# Altium PCB PCB.PcbDoc
Units mil, origin at the board's own origin, x right, y up, seen from the top; angles counter-clockwise.
Board outline 5295 x 4000 mil, 2 copper layers (Top Layer, Bottom Layer); 58 components, 69 nets, 264 pads, 11 vias.
Unrouted connection lines stored in the file: 6.
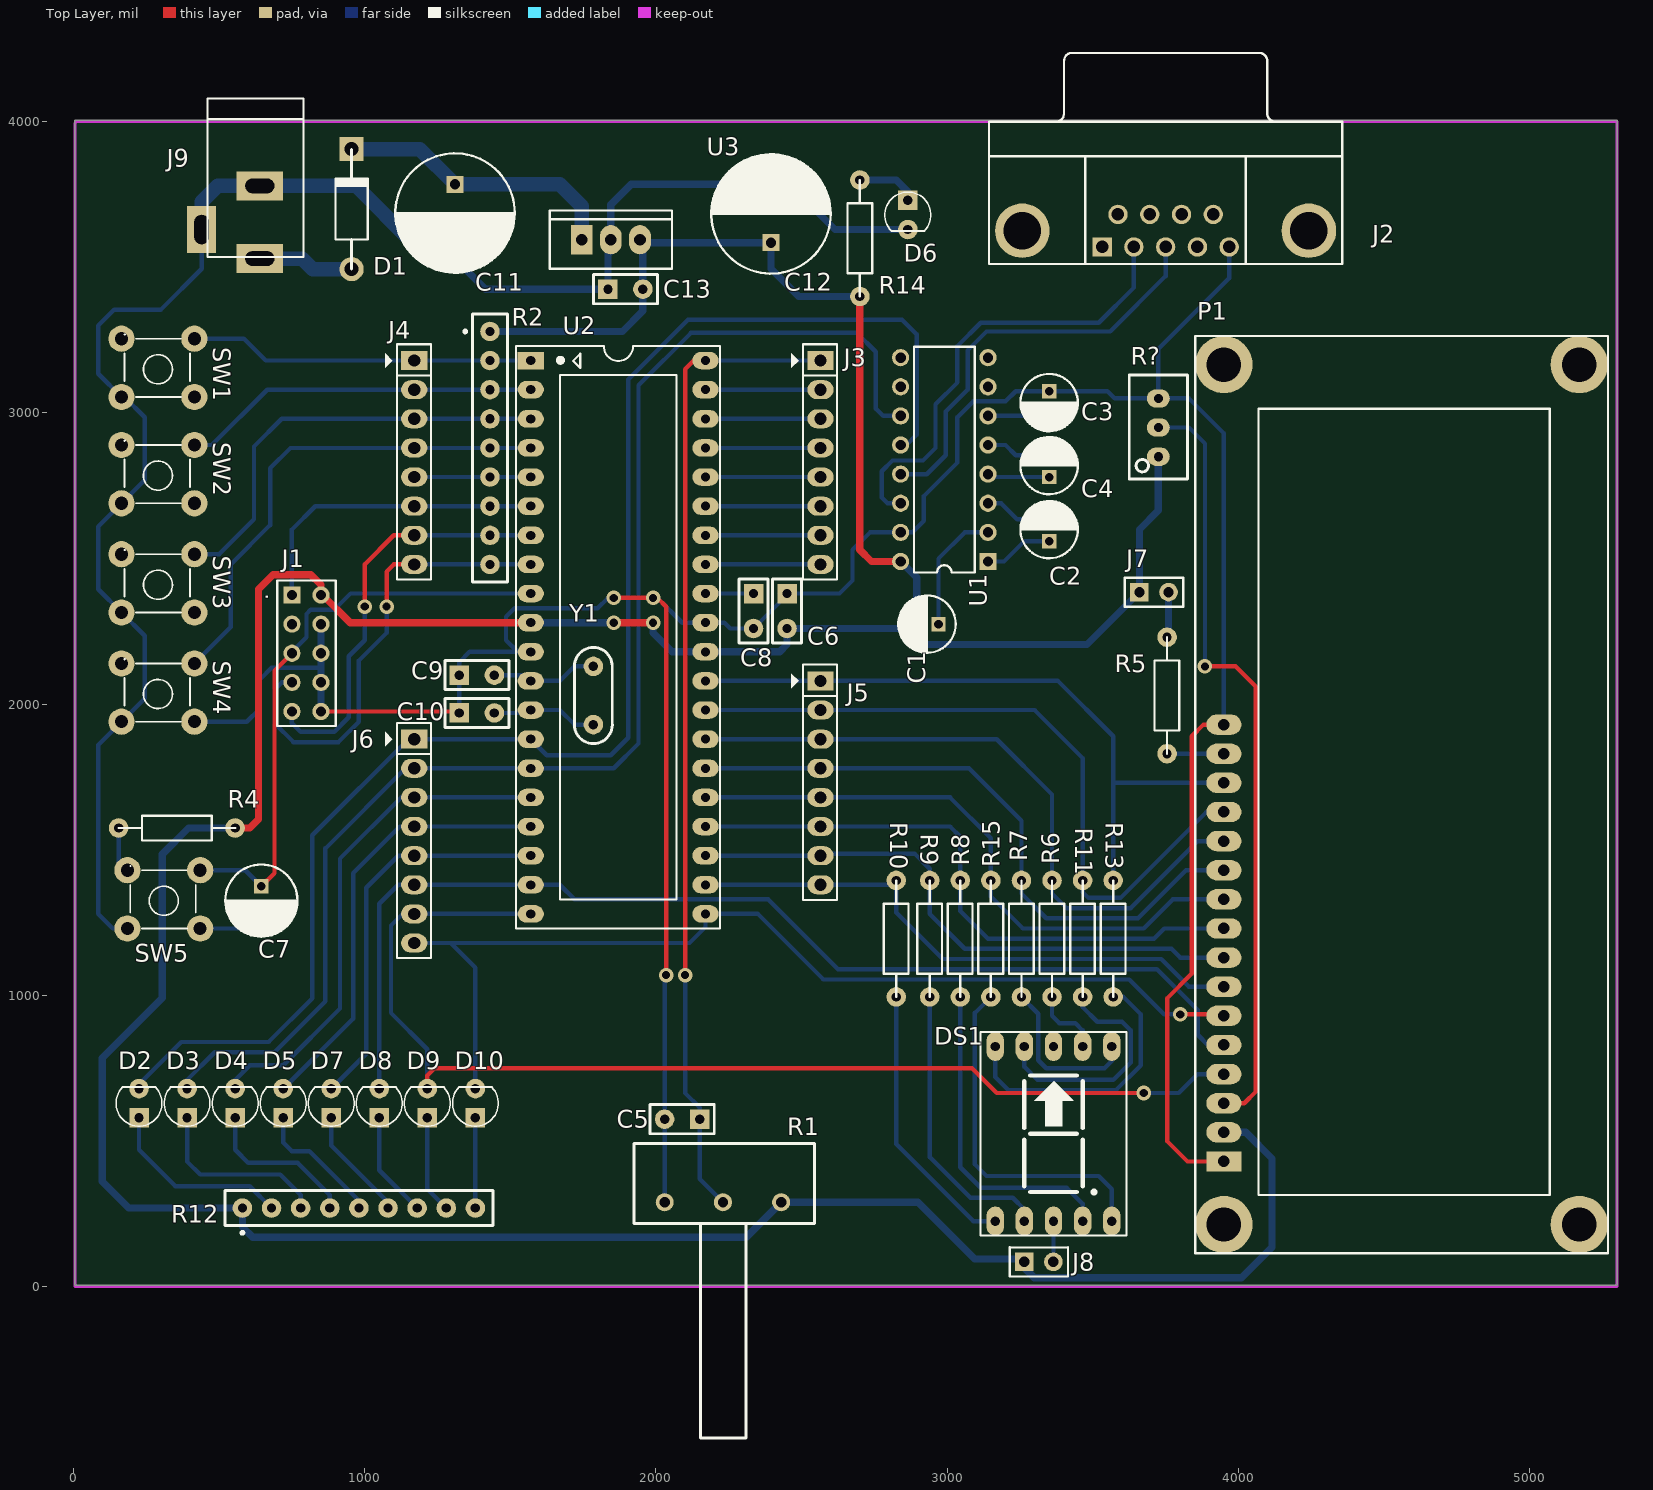
[diagram p0: Top Layer view]
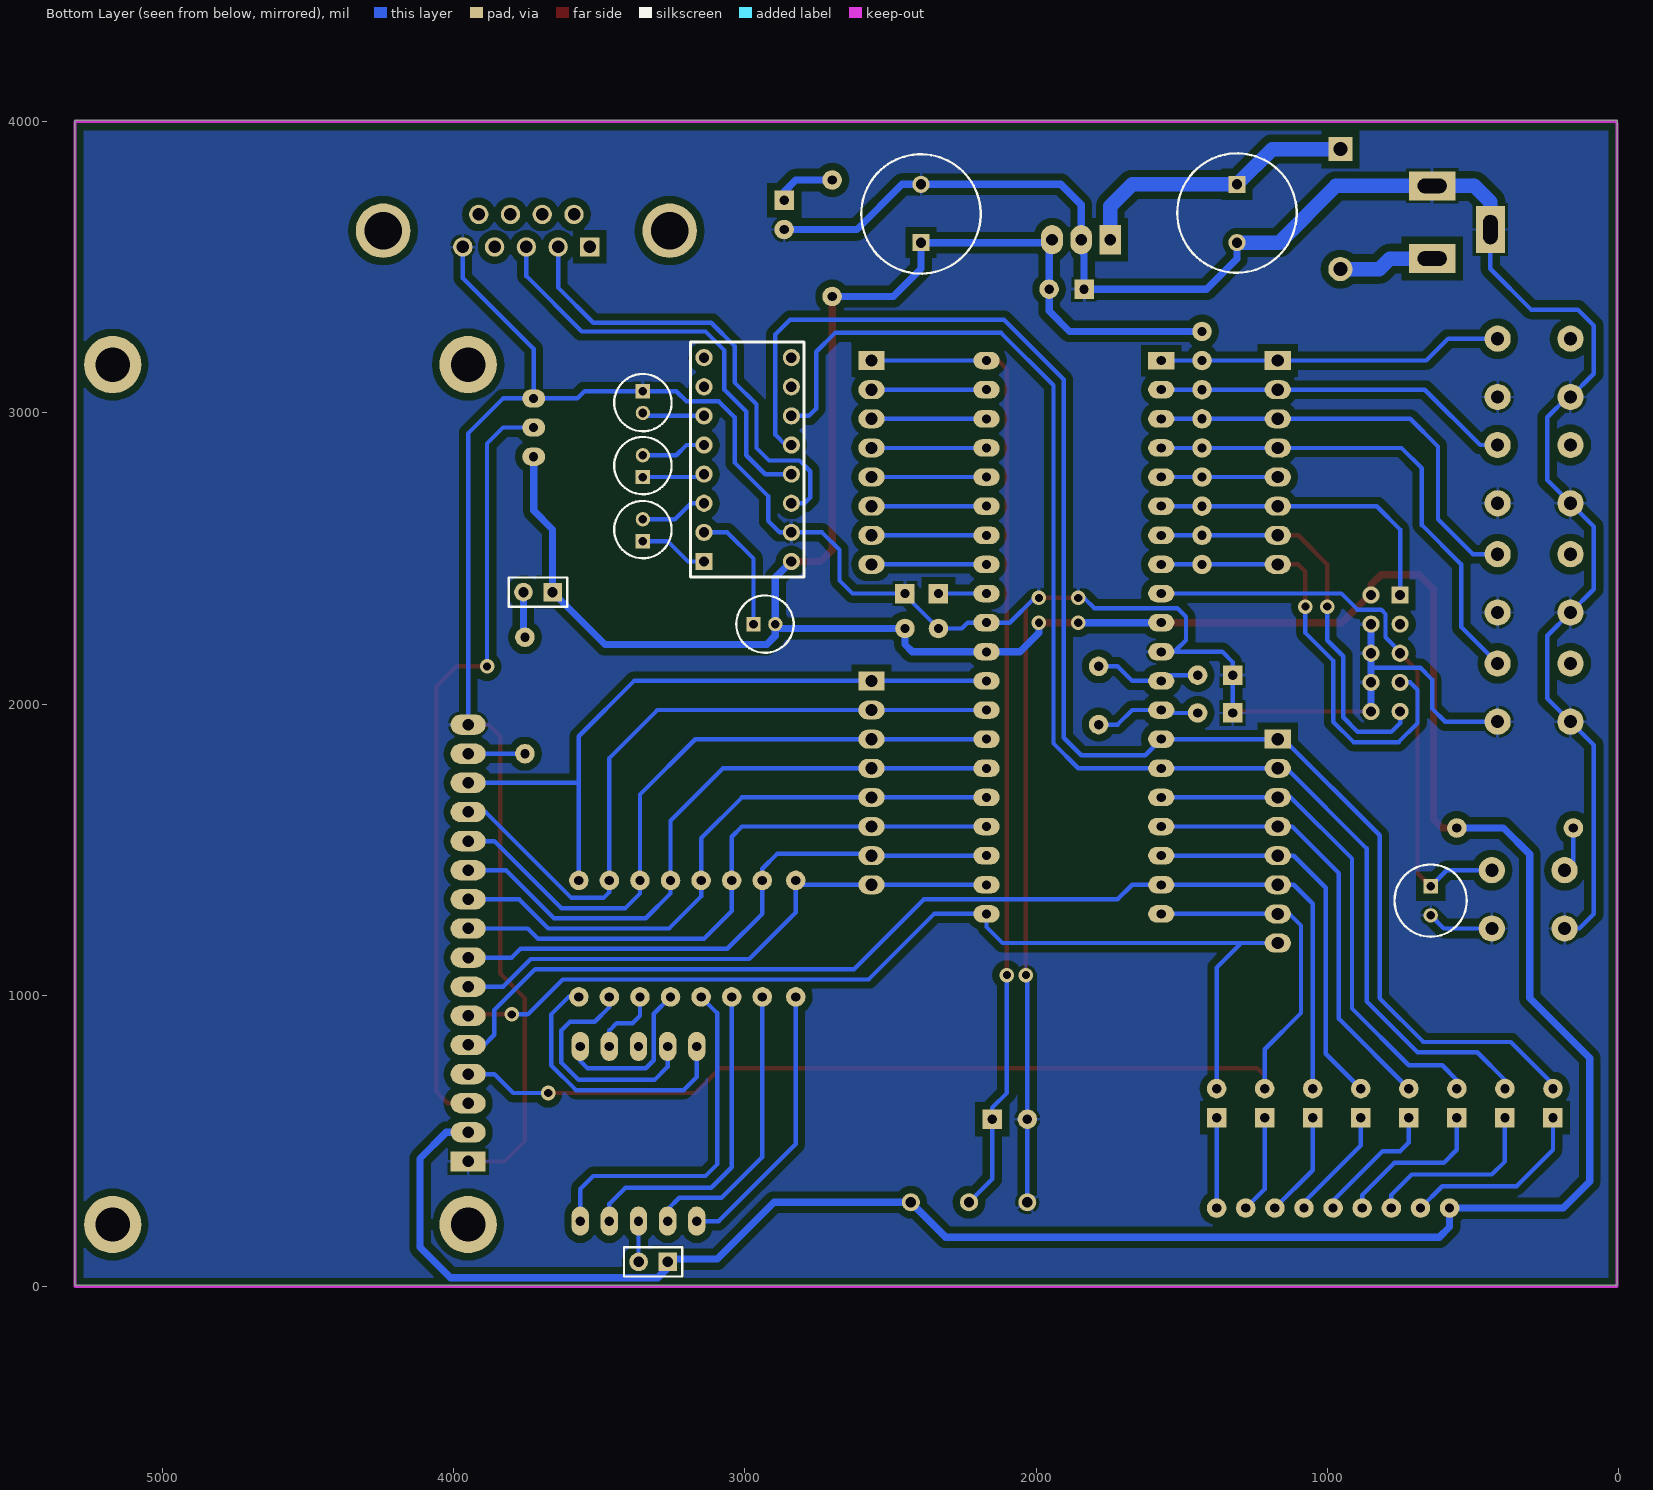
[diagram p1: Bottom Layer view, seen from below]
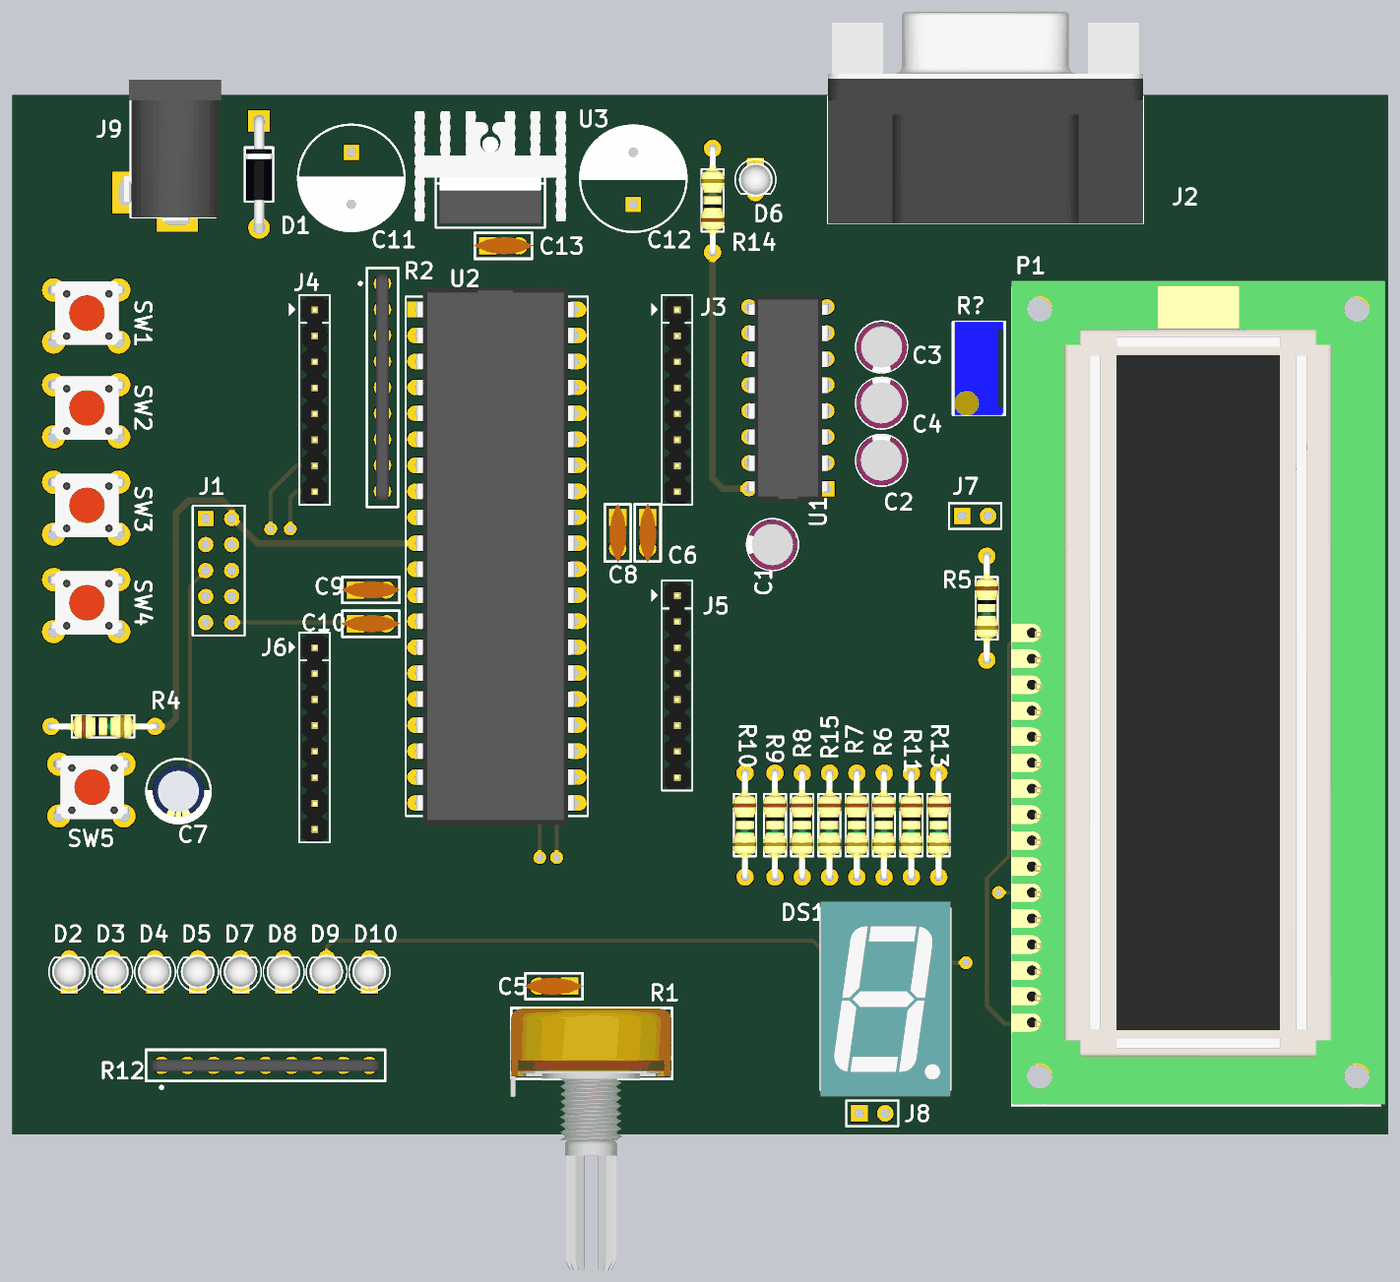
[diagram p2: 3D render of the assembled board from above, using the file's embedded part models]

## Layer stack, top to bottom
Top Solder: solder mask 0.4, Solder Resist, Dk 3.5
Top Layer: signal copper 1.4
Dielectric 1: dielectric 12.6, FR-4, Dk 4.8
Bottom Layer: signal copper 1.4
Bottom Solder: solder mask 0.4, Solder Resist, Dk 3.5

## Board outline
5,5 5300,5 5300,4005 5,4005

## Design rules (kind name [scope] priority, off if disabled: settings)
Clearance [All] p1: gap=10 ignorepadtopadclearanceinfootprint=FALSE
PolygonConnect [All] p1: connectstyle=Relief reliefconductorwidth=10 reliefentries=4 polygonreliefangle="90 Angle" airgapwidth=10
RoutingVias [All] p1: holewidth=28 width=50 viastyle="Through Hole" minholewidth=28 minwidth=50 maxholewidth=28 maxwidth=50
SolderMaskExpansion [All] p1: expansion=4
Width [All] p1: maxlimit=50 minlimit=15 preferedwidth=25
30 further rules are at their usual default settings.

## Components (designator, comment, footprint, x,y, rotation, side; value= is the part's Value field where it differs from the comment)
C1 "Cap Pol" "RADIAL B" 2970,2275 r180 top value=1uF
C2 "Cap Pol" "RADIAL B" 3350,2560 r90 top value=1uF
C3 "Cap Pol" "RADIAL B" 3350,3075 r270 top value=1uF
C4 "Cap Pol" "RADIAL B" 3350,2780 r90 top value=1uF
C5 "Cap Non-pol" "Cap Non-Pol 3mm" 2090,575 r180 top value=100nF
C6 "Cap Non-pol" "Cap Non-Pol 3mm" 2450,2320 r270 top value=100nF
C7 "Cap Pol" "RADIAL C" 645,1375 r270 top value=10uF
C8 "Cap Non-pol" "Cap Non-Pol 3mm" 2335,2320 r270 top value=100nF
C9 "Cap Non-pol" "Cap Non-Pol 3mm" 1385,2100 r0 top value=22pF
C10 "Cap Non-pol" "Cap Non-Pol 3mm" 1385,1970 r0 top value=22pF
C11 "Cap Pol" "RADIAL F" 1310,3785 r270 top value=1000uF
C12 "Cap Pol" "RADIAL F" 2395,3585 r90 top value=1000uF
C13 "Cap Non-pol" "Cap Non-Pol 3mm" 1895,3425 r0 top value=100nF
D1 "1N4007" DO-41 955,3700 r90 top
D2 "LED" "LED-0 3mm RED" 225,630 r180 top
D3 "LED" "LED-0 3mm RED" 390,630 r180 top
D4 "LED" "LED-0 3mm RED" 555,630 r180 top
D5 "LED" "LED-0 3mm RED" 720,630 r180 top
D6 "LED" "LED-0 3mm RED" 2865,3680 r0 top
D7 "LED" "LED-0 3mm RED" 885,630 r180 top
D8 "LED" "LED-0 3mm RED" 1050,630 r180 top
D9 "LED" "LED-0 3mm RED" 1215,630 r180 top
D10 "LED" "LED-0 3mm RED" 1380,630 r180 top
DS1 "7SEG-A" 7SEG_1LED 3165,225 r0 top
J1 "CON.HDR2x5" HDR2X5 750,2375 r270 top
J2 "DB-9 Connector" DB-9 3750,4000 r0 top
J3 "JP8 PIN" JP8 2565,3180 r270 top value=JP7
J4 "JP8 PIN" JP8 1170,3180 r270 top value=JP7
J5 "JP8 PIN" JP8 2565,2080 r270 top value=JP7
J6 "JP8 PIN" JP8 1170,1880 r270 top value=JP7
J7 "LCD jumper" CON.HDR1X2 3660.44,2384.72 r0 top value=J3
J8 "LED7 jumper" CON.HDR1X2 3265,85 r0 top value=J3
J9 "Jac DC" DC-IN 540,3655 r270 top
P1 "LCD16x2" LCD16x2 3954,429 r90 top
R1 "Trimmer" "POT - 24mm" 2230,290 r0 top value=10K
R2 "RES_PACK_8R" "Res Array" 1430,2480 r90 top
R4 "RESISTOR" "Res 10mm (1/2W)" 355,1575 r0 top value=10K
R5 "RESISTOR" "Res 10mm (1/2W)" 3755,2030 r270 top value=0R
R6 "RESISTOR" "Res 10mm (1/2W)" 3360,1195 r270 top value=1K
R7 "RESISTOR" "Res 10mm (1/2W)" 3255,1195 r270 top value=1K
R8 "RESISTOR" "Res 10mm (1/2W)" 3045,1195 r270 top value=1K
R9 "RESISTOR" "Res 10mm (1/2W)" 2940,1195 r270 top value=1K
R10 "RESISTOR" "Res 10mm (1/2W)" 2825,1195 r270 top value=1K
R11 "RESISTOR" "Res 10mm (1/2W)" 3465,1195 r270 top value=1K
R12 "RES_PACK_8R" "Res Array" 1380,270 r180 top
R13 "RESISTOR" "Res 10mm (1/2W)" 3570,1195 r270 top value=1K
R14 "RESISTOR" "Res 10mm (1/2W)" 2700,3600 r90 top value=1K
R15 "RESISTOR" "Res 10mm (1/2W)" 3150,1195 r270 top value=1K
R? "RV20K" RVAR10K 3725,2950 r90 top
SW1 "SW" SW4 415,3055 r180 top value="Button chip 4 pin"
SW2 "SW" SW4 415,2690 r180 top value="Button chip 4 pin"
SW3 "SW" SW4 415,2315 r180 top value="Button chip 4 pin"
SW4 "SW" SW4 415,1940 r180 top value="Button chip 4 pin"
SW5 "SW" SW4 435,1230 r180 top value="Button chip 4 pin"
U1 "MAX3232" DIP16 3140,2490 r90 top
U2 "ATMEL 16L" DIP40/W0.6 1570,3180 r270 top value="Atmega 16L"
U3 "LM78xx" TO-220-3-Heatsink 1745,3595 r0 top value=LM7805CT
Y1 "8MHz" XTAL 1785,2030 r180 top

## Footprints (in the part's own frame and the unit in brackets; to place one, negate y for a bottom-side part, rotate by r counter-clockwise, add the part's x,y. Pads: shape width x height; smd on the part's side, far side on the other; paste and mask are expansions set on the pad)
7SEG_1LED [mil] "DIP 10 Leads; Body 12 x 15 mm; Pitch 0.5 mm"
  oval 60x100 hole 32: 1(0,0) 2(100,0) 3(200,0) 4(300,0) 5(400,0) 6(400,600) 7(300,600) 8(200,600) 9(100,600) 10(0,600)
  silkscreen extent -50,-50 450,650, body extent -50,-75 450,675, height 316
"Cap Non-Pol 3mm" [mil] "Capacitor, Radial; Body 5.6 x 2.5 mm (L x W typ); Pin Spacing 3 mm (typ); Solder Pad 35mil"
  rect 67x67 hole 32: 1(-60,0)
  round 67 hole 32: 2(60,0)
  silkscreen extent -110,-50 110,50, body extent -115,-33 115,34, height 245
CON.HDR1X2 [mil]
  rect 64x64 hole 35.43: 1(-0.44,0.28)
  round 64 hole 35.43: 2(99.56,0.28)
  silkscreen extent -51,-50 150,50, body extent -51,-50 149,50, height 350
DB-9 [mm] "Connector; D Subminiature; 9 Position; Right Angle; Pitch 1.385 mm"
  rect 1.69x1.69 hole 1.09: 1(-5.54,-10.92)
  round 1.69 hole 1.09: 2(-2.77,-10.92) 3(0,-10.92) 4(2.77,-10.92) 5(5.54,-10.92) 6(-4.155,-8.08) 7(-1.385,-8.08) 8(1.385,-8.08) 9(4.155,-8.08)
  round 4.76 hole 3.26: 10(-12.495,-9.5) 11(12.495,-9.5)
  silkscreen extent -15.4,-12.4 15.4,6, body extent -15.4,-12.47 15.4,8.23, height 3.34
DC-IN [mil] "Jac DC input"
  rect 100x160 hole 50 slot 100 at 90 deg: 1(125,100) 2(-125,100)
  rect 160x100 hole 50 slot 100 at 0 deg: 3(25,-100)
  silkscreen extent -425,-80 120,250, body extent -410,-105 134,269, height 434
DIP16 [mm] "DIP; 16 Leads; Row Spacing 7.62 mm; Pitch 2.54 mm"
  rect 1.5x1.5 hole 0.9: 1(0,0)
  round 1.5 hole 0.9: 2(2.54,0) 3(5.08,0) 4(7.62,0) 5(10.16,0) 6(12.7,0) 7(15.24,0) 8(17.78,0) 9(17.78,7.62) 10(15.24,7.62) 11(12.7,7.62) 12(10.16,7.62) 13(7.62,7.62) 14(5.08,7.62) 15(2.54,7.62) 16(0,7.62)
  silkscreen extent -0.96,1.16 18.74,6.46, body extent -1.15,-0.15 18.85,7.73, height 5.08
DIP40/W0.6 [mil] "40 PIN, W 600mil, Pin to pin 100mil"
  rect 60x90 hole 31: 1(0,0)
  oval 60x90 hole 31: 2(100,0) 3(200,0) 4(300,0) 5(400,0) 6(500,0) 7(600,0) 8(700,0) 9(800,0) 10(900,0) 11(1000,0) 12(1100,0) 13(1200,0) 14(1300,0) 15(1400,0) 16(1500,0) 17(1600,0) 18(1700,0) 19(1800,0) 20(1900,0) 21(1900,600) 22(1800,600) 23(1700,600) 24(1600,600) 25(1500,600) 26(1400,600) 27(1300,600) 28(1200,600) 29(1100,600) 30(1000,600) 31(900,600) 32(800,600) 33(700,600) 34(600,600) 35(500,600) 36(400,600) 37(300,600) 38(200,600) 39(100,600) 40(0,600)
  silkscreen extent -50,-50 1950,650, body extent -82,-10 1982,600, height 224
DO-41 [mil] "Diode, Axial; Body 5.2 x 2.7 mm (LxDia. max), Lead Dia. 0.86 mm (max); Solder Pad 35mil"
  round 83 hole 48: 1(-205.91,0)
  rect 83x83 hole 48: 2(205.91,0)
  silkscreen extent -205,-55 205,55, body extent -228,-49 228,49, height 104
HDR2X5 [mm] "Connector; Header; 5x2 Position"
  rect 1.5x1.5 hole 0.9: 1(0,0)
  round 1.5 hole 0.9: 2(0,2.54) 3(2.54,0) 4(2.54,2.54) 5(5.08,0) 6(5.08,2.54) 7(7.62,0) 8(7.62,2.54) 9(10.16,0) 10(10.16,2.54)
  silkscreen extent -1.27,-1.27 11.43,3.81
JP8 [mil] "JP8"
  rect 65x90 hole 42: 1(0,0)
  oval 65x90 hole 42: 2(100,0) 3(200,0) 4(300,0) 5(400,0) 6(500,0) 7(600,0) 8(700,0)
  silkscreen extent -56,-100 752,57, body extent -48,-50 748,48, height 323
LCD16x2 [mil] "Character LCD 16x2"
  round 196.85 hole 118.11: 0(-215.54,4) 0(-215.54,-1216.47) 0(2737.22,-1216.47) 0(2737.22,4)
  rect 70x120 hole 39.37: 1(1,4)
  oval 70x120 hole 39.37: 2(101,4.02) 3(201,4) 4(301,4) 5(401,4) 6(501,4) 7(601,4) 8(701,4) 9(801,4) 10(901,4) 11(1001,4) 12(1101,4) 13(1201,4) 14(1301,4) 15(1401,4) 16(1501,4)
  round 0 all layers, no hole: ""(-215.54,4)
  silkscreen extent -314,-1315 2836,102, body extent -309,-1333 2861,104, height 788
"LED-0 3mm RED" [mil] "Typical LED; RED; 2 Leads; Solder Pad 35mil"
  rect 67x67 hole 32: 1(0,50)
  round 67 hole 32: 2(0,-50)
  silkscreen extent -79,-56 79,79, body extent -64,-66 66,64, height 207
"POT - 24mm" [mil]
  round 62 hole 35: 1(-200,0) 2(0,0) 3(200,0)
  silkscreen extent -305,-810 314,201, body extent -308,-808 312,198, height 812
"RADIAL B" [mm] "Capacitor, Electrolytic, Radial; Body 5 x 6.8 mm (Dia.xH typ); Pin Spacing 2 mm (typ)"
  rect 1.25x1.25 hole 0.75: 1(0,0)
  round 1.25 hole 0.75: 2(1.905,0)
  silkscreen extent -1.5,-2.5 3.5,2.51, body extent -1.48,-2.49 3.52,2.51, height 11
"RADIAL C" [mm] "Capacitor, Electrolytic, Radial; Body 6.3 x 6.8 mm (Dia.xH typ); Pin Spacing 2.5 mm (typ)"
  rect 1.25x1.25 hole 0.75: 1(0,0)
  round 1.25 hole 0.75: 2(2.54,0)
  silkscreen extent -1.9,-3.15 4.4,3.15, body extent -1.27,-2.54 3.81,2.54, height 13.7
"RADIAL F" [mm] "Capacitor, Electrolytic, Radial; Body 10 x 10.5 mm (Dia.xH typ); Pin Spacing 5 mm (typ)"
  rect 1.5x1.5 hole 0.9: 1(0,0)
  round 1.5 hole 0.9: 2(5.08,0)
  silkscreen extent -2.71,-5.21 7.75,5.21, body extent -2.54,-5.08 7.54,5.08, height 11.51
"Res 10mm (1/2W)" [mil] "Resistor; 2 Leads; 1/2W; Solder Pad 35mil"
  round 67 hole 32: 1(-200,0) 2(200,0)
  silkscreen extent -200,-43 200,42, body extent -212,-46 212,45, height 96
"Res Array" [mil] "Resistor Array; 9 Leads; Solder Pad 35mil"
  round 67 hole 32: 1(0,0) 2(100,0) 3(200,0) 4(300,0) 5(400,0) 6(500,0) 7(600,0) 8(700,0) 9(800,0)
  silkscreen extent -60,-60 860,90, body extent -42,-24 843,25, height 199
RVAR10K [mm] "Bien tro vi chinh"
  oval 1.6x2 hole 0.8: 1(-2.54,0) 2(0,0) 3(2.54,0)
  silkscreen extent -4.47,-2.54 4.6,2.54, body extent -4.54,-2.4 4.66,2.4, height 12.02
SW4 [mil] "SW button 4pin, 250 x250 mil"
  round 90 hole 45: 1(0,0) 2(250,-200) 3(250,0) 4(0,-200)
  silkscreen extent 15,-215 240,0, body extent -34,-233 278,11, height 276
TO-220-3-Heatsink [mil] "TO-220; Heatsink; 3 Leads; Solder Pad 35mil"
  rect 75x100 hole 40: 1(0,0)
  oval 75x100 hole 40: 2(100,0) 3(200,0)
  silkscreen extent -110,-100 310,100, body extent -191,-83 391,349, height 985
XTAL [mil] "Crystal, Thru-Hole; 2 Leads; Body 3.1 x 8.2 mm (Dia.xH); Solder pad 35mil"
  round 67 hole 32: 1(0,100) 2(0,-100)
  silkscreen extent -65,-165 65,165, body extent -92,-223 92,223, height 139

## Part data
C1 C2 C3 C4 C7 C11 C12: "Polarized Capacitor", LatestRevisionNote="Re-released for DXP Platform.", PackageReference=POLAR0.8, Publisher="Altium Limited"
C5 C6 C8 C9 C10 C13: "Non-polarized Capacitor", LatestRevisionNote="Re-released for DXP Platform.", PackageReference=RAD-0.3, Publisher="Altium Limited"
D1: library part "Diode 1N4007", "1 Amp General Purpose Rectifier", Code_JEDEC=DO-204-AL, ComponentLink1Description="Manufacturer Link", ComponentLink1URL=http://www.fairchildsemi.com/, ComponentLink2Description=Datasheet, ComponentLink2URL=http://www.fairchildsemi.com/ds/1N%2F1N4001.pdf, DatasheetVersion=1998, LatestRevisionDate=17-Jul-2002, LatestRevisionNote="Re-released for DXP Platform.", PackageDescription="Diode, Axial; Body 5.2 x 2.7 mm (LxDia. max), Lead Dia. 0.86 mm (max)", PackageReference=DO-41, PackageVersion=Aug-1999, Published=8-Jun-2000, Publisher="Altium Limited"
D2 D3 D4 D5 D6 D7 D8 D9 D10: "Typical LED", LatestRevisionDate=08-Jul-2005, LatestRevisionNote="Mech Layer 1 removed.", PackageReference=LED-1, Published=8-Jun-2000, Publisher="Altium Limited"
DS1: library part LED7SEG-A, "14.2 mm General Purpose Blue 7-Segment Display: CA, RH DP, Gray Surface", Colour=Blue, PackageDocument=24-Sep-2002, ComponentLink1Description="Manufacturer Link", ComponentLink1URL=http://www.agilent.com/, DatasheetDocument=24-Sep-2002, LatestRevisionDate=17-Dec-2003, LatestRevisionNote="Schematic revised, PCB Footprint replaced.", MinimumIntensity="2020 ucd", Note="IF = 10 mA", PackageReference=H, Published=8-Jun-2000, Publisher="Altium Limited"
J1: "Header 2x5", ComponentLink1Description="Digikey Part link", ComponentLink2Description="Open DataSheet", ComponentLink2URL=H:\LIBRARY\LIBRARY.Datasheet\, Publisher="Hoang Nguyen"
J2: "9-pin, D-Subminiature Connector", PackageDocument=O, DatasheetDocument=1-Sep-1999, Gender=Receptacle, LatestRevisionDate=17-Jul-2002, LatestRevisionNote="Re-released for DXP Platform.", Orientation="Right Angle", PackageReference=788750, Positions=9, Published=15-Jun-2001, Publisher="Altium Limited"
J3 J4 J5 J6: library part JP8
J7 J8: library part JP2, "Jumper 3"
J9: library part DCIN, "Jac DC input"
P1: library part "LCD Text"
R1: library part "Variable Resistor", ComponentLink1Description="Digikey Part Link", ComponentLink2Description="Open Datasheet", ComponentLink2URL=H:\LIBRARY\LIBRARY.Datasheet\, LatestRevisionDate=04-Mar-2005, LatestRevisionNote="PCB Footprint replaced.", PackageReference=J1-0603, Published=8-Jun-2000, Publisher="Altium Limited", Vendor=Digikey
R2 R12: "Isolated Resistor Network", Code_JEDEC=MO-150-AC, LatestRevisionDate=17-Jul-2002, LatestRevisionNote="Re-released for DXP Platform.", PackageReference=SSOP16, Published=24-Mar-1999, Publisher="Altium Limited"
R4 R5 R6 R7 R8 R9 R10 R11 R13 R14 R15: "Resistor", LatestRevisionDate=17-Jul-2002, LatestRevisionNote="Re-released for DXP Platform.", PackageReference=AXIAL-0.3, Published=8-Jun-2000, Publisher="Altium Limited"
R?: library part "Variable Resistor_1", "Variable Resistor", LatestRevisionDate=17-Jul-2002, LatestRevisionNote="Re-released for DXP Platform.", PackageReference=VR5, Published=8-Jun-2000, Publisher="Altium Limited", Set Position=0.5, Sim Note="Enter the Resistance value and the set point into parameter fields."
SW1 SW2 SW3 SW4 SW5: library part SW4, "Switch button 4 pin"
U1: library part MAX232, "3.0V TO 5.5V, Low-Power, up to 1Mbps, True RS-232 Transceiver Using Four 0.1µF External Capacitor", Manufacturer="Maxim Integrated Products", Manufacturer P/N=MAX3232CSE+, ComponentLink1Description="Digikey Part Link", ComponentLink2Description="Open Datasheet", ComponentLink2URL=H:\LIBRARY\LIBRARY.Datasheet\, Price="10000 VND", Published=13-April-2009, Publisher="Hoang Nguyen", Vendor=Digikey, Vendor P/N=MAX3232CSE+-ND
U2: library part Atmega16L, "8-Bit AVR Microcontroller with 16K Bytes of In-System Programmable Flash Memory", Designed By="John MacTavish"
U3: "Regulator", Manufacturer="Fairchild Semiconductor Corporation", Output Current="Up to 1A", PSpiceTemplate="X^@REFDES %IN %OUT %GND @MODEL", Tolerance="4 %", ComponentLink1Description="Digikey Part Link", ComponentLink2Description="Open Datasheet", ComponentLink2URL=H:\LIBRARY\LIBRARY.Datasheet\LM7805.pdf, Price="2500 VND", Published=13-April-2009, Publisher="Hoang Nguyen", Vendor=Digikey, V out=5V
Y1: library part XTAL, "Crystal Oscillator", LatestRevisionDate=17-Jul-2002, LatestRevisionNote="Re-released for DXP Platform.", PackageReference=R38, Published=8-Jun-2000, Publisher="Altium Limited"

## Via types
v1: diameter 50, hole 28, Top Layer to Bottom Layer, 11 vias

## Nets (pads, with @x,y where several pads share a name; then routed paths per layer and width w, separated by ;. In a path a pad name is that pad's centre, name@x,y a point inside that pad or via, vN(x,y) a via of type N, cw(c..) or ccw(c..) an arc to the next point about the centre after c; other vN are vias at no path point)
GND: C3.1 C5.2 C6.1 C7.2 C8.2 C9.1 C10.1 C11.2 C12.2 C13.1 D6.2 J1.4 J1.6 J1.8 J1.10 J2.5 J9.2 J9.3 P1.1 P1.16 R1.1 R?.3 SW1.1 SW1.3 SW2.1 SW2.3 SW3.1 SW3.3 SW4.1 SW4.3 SW5.1 SW5.3 U1.15 U2.11 U2.31 U3.2 | length 16895
  Top Layer w15: J1.10 1320,1975 C10.1 ; v1(1855,2365) v1(1990,2365) 2005,2365 2035,2335 v1(2035,1070) ; P1.1 3825,430 3755,500 3755,990 3840,1075 3840,1890 3880,1930 P1.16
  Bottom Layer w15: SW5.3 135,1230 85,1280 85,1860 SW4.3 245,2020 245,2235 SW3.3 85,2395 85,2610 SW2.3 245,2770 245,2985 175,3055 SW1.3 85,3135 85,3300 140,3355 300,3355 440,3495 J9.3 ; SW4.1 595,1940 640,1985 640,2085 680,2125 850,2125 ; SW5.1 600,1230 C7.2 ; C10.1 C9.1 1325,2145 1360,2180 U2.11@1525,2180 ; U2.11 U2.11@1525,2180 ; v1(1855,2365) 1835,2365 1800,2330 1515,2330 1485,2300 1485,2220 U2.11@1525,2180 ; v1(1990,2365) 2005,2365 2090,2280 U2.31 2235,2280 2255,2260 C8.2 2440,2365 2425,2380 C6.1 2630,2380 2675,2425 2675,2530 2735,2590 U1.15 2880,2590 2920,2630 2920,2715 3035,2830 3035,2985 3090,3040 3200,3040 3235,3075 C3.1 3550,3075 3575,3050 R?.3 ; R1.1 C5.2 2030,1065 v1(2035,1070) ; P1.16 3950,2930 3830,3050 R?.3 ; J2.5 3968.11,3463.11 3725,3220 R?.3
  Bottom Layer w25: J1.10 J1.8 850,2125 J1.6 J1.4 ; C11.2 1310,3530 1415,3425 C13.1 1835,3545 1845,3555 U3.2 1845,3715 1915,3785 C12.2 2460,3785 2615,3630 D6.2
  Bottom Layer w50: J9.3 440,3725 495,3780 J9.2 970,3780 1165,3585 C11.2
MISO: J1.9 J4.7 R2.2 U2.7 | length 1427.3
  Top Layer w15: v1(1000,2335) 1000,2480 1100,2580 J4.7
  Bottom Layer w15: J1.9 750,1935 780,1905 895,1905 945,1955 945,2165 1000,2220 v1(1000,2335) ; J4.7 R2.2 U2.7
MOSI: J1.1 J4.6 R2.3 U2.6 | length 1078.1
  Bottom Layer w15: J1.1 750,2600 830,2680 J4.6 R2.3 U2.6
NetC1_1: C1.1 U1.2 | length 432.3
  Bottom Layer w15: C1.1 2970,2500 3060,2590 U1.2
NetC2_1: C2.1 U1.1 | length 239
  Bottom Layer w15: U1.1 3195,2490 3265,2560 C2.1
NetC2_2: C2.2 U1.3 | length 232.8
  Bottom Layer w15: U1.3 3185,2690 3240,2635 C2.2
NetC3_2: C3.2 U1.6 | length 214.1
  Bottom Layer w15: U1.6 3340,2990 C3.2
NetC4_1: C4.1 U1.4 | length 214.1
  Bottom Layer w15: U1.4 3150,2790 3160,2780 C4.1
NetC4_2: C4.2 U1.5 | length 224.5
  Bottom Layer w15: U1.5 3200,2890 3235,2855 C4.2
NetC5_1: C5.1 J3.1 R1.2 U2.40 | length 3391.3
  Top Layer w15: v1(2100,1070) 2100,3150 2130,3180 U2.40
  Bottom Layer w15: v1(2100,1070) 2100,665 2150,615 C5.1 2150,370 R1.2 ; U2.40 J3.1
NetC8_1: C8.1 U2.32 | length 165
  Bottom Layer w15: U2.32 C8.1
NetC9_2: C9.2 U2.12 Y1.2 | length 369
  Bottom Layer w15: C9.2 1550,2100 U2.12 1670,2080 1720,2130 Y1.2
NetC10_2: C10.2 U2.13 Y1.1 | length 364.9
  Bottom Layer w15: C10.2 1560,1970 U2.13 1670,1980 1720,1930 Y1.1
NetC11_1: C11.1 D1.2 U3.1 | length 986.1
  Bottom Layer w50: D1.2 1189.09,3905.91 C11.1 1670,3785 1745,3710 U3.1
NetD1_1: D1.1 J9.1 | length 329.9
  Bottom Layer w50: J9.1 785,3530 820.91,3494.09 D1.1
NetD2_1: D2.1 R12.8 | length 647.8
  Bottom Layer w15: D2.1 225,470 350,345 605,345 R12.8
NetD3_1: D3.1 R12.7 | length 632.6
  Bottom Layer w15: D3.1 390,430 435,385 710,385 780,315 R12.7
NetD4_1: D4.1 R12.6 | length 544.2
  Bottom Layer w15: D4.1 555,470 600,425 770,425 880,315 R12.6
NetD5_1: D5.1 R12.5 | length 452.8
  Bottom Layer w15: D5.1 720,495 750,465 810,465 980,295 R12.5
NetD6_1: D6.1 R14.2 | length 211.6
  Bottom Layer w25: R14.2 2825,3800 2865,3760 D6.1
NetD7_1: D7.1 R12.4 | length 390.8
  Bottom Layer w15: D7.1 885,485 1080,290 R12.4
NetD8_1: D8.1 R12.3 | length 363.8
  Bottom Layer w15: D8.1 1050,400 R12.3
NetD9_1: D9.1 R12.2 | length 336.9
  Bottom Layer w15: D9.1 1215,335 R12.2
NetD10_1: D10.1 R12.1 | length 310
  Bottom Layer w15: R12.1 D10.1
NetDS1_1: DS1.1 R10.2 | length 954.8
  Bottom Layer w15: R10.2 2825,490 3090,225 DS1.1
NetDS1_2: DS1.2 R9.2 | length 989.6
  Bottom Layer w15: R9.2 2940,445 3080,305 3225,305 3265,265 DS1.2
NetDS1_3: DS1.3 DS1.8 J8.2 | length 139.9
  Bottom Layer w15: J8.2 3365,85.72 DS1.3
NetDS1_4: DS1.4 R8.2 | length 1116.8
  Bottom Layer w15: R8.2 3045,410 3115,340 3410,340 3465,285 DS1.4
NetDS1_5: DS1.5 R15.2 | length 1213
  Bottom Layer w15: R15.2 3095,940 3095,420 3135,380 3520,380 3565,335 DS1.5
NetDS1_6: DS1.6 R7.2 | length 565.6
  Bottom Layer w15: R7.2 3312.5,937.5 3312.5,777.5 3340,750 3540,750 3565,775 DS1.6
NetDS1_7: DS1.7 R6.2 | length 245.7
  Bottom Layer w15: R6.2 3360,930 3385,905 3440,905 3465,880 DS1.7
NetDS1_9: DS1.9 R11.2 | length 821.6
  Bottom Layer w15: DS1.9 3265,755 3310,710 3570,710 3630,770 3630,880 3600,910 3515,910 3465,960 R11.2
NetDS1_10: DS1.10 R13.2 | length 953.7
  Bottom Layer w15: DS1.10 3165,720 3210,675 3580,675 3665,760 3665,935 3605,995 R13.2
NetJ3_2: J3.2 U2.39 | length 395
  Bottom Layer w15: U2.39 J3.2
NetJ3_3: J3.3 U2.38 | length 395
  Bottom Layer w15: U2.38 J3.3
NetJ3_4: J3.4 U2.37 | length 395
  Bottom Layer w15: U2.37 J3.4
NetJ3_5: J3.5 U2.36 | length 395
  Bottom Layer w15: U2.36 J3.5
NetJ3_6: J3.6 U2.35 | length 395
  Bottom Layer w15: U2.35 J3.6
NetJ3_7: J3.7 U2.34 | length 395
  Bottom Layer w15: U2.34 J3.7
NetJ3_8: J3.8 U2.33 | length 395
  Bottom Layer w15: U2.33 J3.8
NetJ7_2: J7.2 R5.1 | length 157.1
  Bottom Layer w25: R5.1 3760,2235 J7.2
NetP1_3: P1.3 R?.2 | length 2668.3
  Top Layer w15: v1(3885,2130) 3990,2130 4060,2060 4060,670 4020,630 P1.3
  Bottom Layer w15: R?.2 3830,2950 3885,2895 v1(3885,2130)
NetP1_15: P1.15 R5.2 | length 195
  Bottom Layer w15: R5.2 P1.15
PB0: J4.1 R2.8 SW1.2 SW1.4 U2.1 | length 1186.1
  Bottom Layer w15: SW1.4 585,3255 660,3180 J4.1 R2.8 U2.1
PB1: J4.2 R2.7 SW2.2 SW2.4 U2.2 | length 1233.7
  Bottom Layer w15: SW2.4 475,2890 665,3080 J4.2 R2.7 U2.2
PB2: J4.3 R2.6 SW3.2 SW3.4 U2.3 | length 1494.1
  Bottom Layer w15: SW3.4 500,2515 620,2635 620,2885 715,2980 J4.3 R2.6 U2.3
PB3: J4.4 R2.5 SW4.2 SW4.4 U2.4 | length 1701.7
  Bottom Layer w15: SW4.4 540,2265 540,2480 675,2615 675,2810 745,2880 J4.4 R2.5 U2.4
PB4: J4.5 R2.4 U2.5 | length 400
  Bottom Layer w15: J4.5 R2.4 U2.5
PC0: J5.8 P1.7 R10.1 U2.22 | length 2001.8
  Bottom Layer w15: U2.22 J5.8 2810,1380 R10.1 2825,1285 2985,1125 3735,1125 3830,1030 P1.7
PC1: J5.7 P1.8 R9.1 U2.23 | length 2024.3
  Bottom Layer w15: U2.23 J5.7 2565,1486 2889,1486 2940,1435 R9.1 2940,1280 3060,1160 3770,1160 3800,1130 P1.8
PC2: J5.6 P1.9 R8.1 U2.24 | length 2103.3
  Bottom Layer w15: U2.24 J5.6 3010,1580 3045,1545 R8.1 3045,1290 3140,1195 3710,1195 3745,1230 P1.9
PC3: J5.5 P1.10 R15.1 U2.25 | length 2125
  Bottom Layer w15: U2.25 J5.5 3010,1680 3150,1540 R15.1 3150,1340 3260,1230 3675,1230 3775,1330 P1.10
PC4: J5.4 P1.11 R7.1 U2.26 | length 2208.1
  Bottom Layer w15: U2.26 J5.4 3075,1780 3255,1600 R7.1 3255,1350 3340,1265 3655,1265 3820,1430 P1.11
PC5: J5.3 P1.12 R6.1 U2.27 | length 2314.7
  Bottom Layer w15: U2.27 J5.3 3170,1880 3360,1690 R6.1 3360,1350 3410,1300 3630,1300 3860,1530 P1.12
PC6: J5.2 P1.13 R11.1 U2.28 | length 2438.8
  Bottom Layer w15: U2.28 J5.2 3300,1980 3465,1815 R11.1 3465,1355 3485,1335 3595,1335 3890,1630 P1.13
PC7: J5.1 P1.14 R13.1 U2.29 | length 2355.8
  Bottom Layer w15: U2.29 J5.1 3380,2080 3570,1890 3570,1735 ; R13.1 3570,1735 ; P1.14 3575,1730 3570,1735
PD2: D4.2 J6.3 U2.16 | length 1748.5
  Bottom Layer w15: D4.2 555,710 605,760 720,760 915,955 915,1470 1125,1680 J6.3 U2.16
PD3: D5.2 J6.4 U2.17 | length 1515.7
  Bottom Layer w15: D5.2 960,920 960,1420 1120,1580 J6.4 U2.17
PD4: D7.2 J6.5 U2.18 | length 1350.3
  Bottom Layer w15: D7.2 1005,800 1005,1370 1115,1480 J6.5 U2.18
PD5: D8.2 J6.6 P1.5 U2.19 | length 3839.5
  Bottom Layer w15: D8.2 1050,1315 1115,1380 J6.6 U2.19 1670,1380 1720,1330 2385,1330 2625,1090 3720,1090 3860,950 3860,865 3895,830 P1.5
PD6: D9.2 J6.7 P1.4 U2.20 | length 3960.8
  Top Layer w15: D9.2 1215,725 1240,750 3085,750 3170,665 v1(3675,665)
  Bottom Layer w15: D9.2 1215,815 1090,940 1090,1240 1130,1280 J6.7 U2.20 ; v1(3675,665) 3795,665 3860,730 P1.4
PD7: D10.2 J6.8 P1.6 U2.21 | length 3528
  Top Layer w15: v1(3800,935) 3945,935 P1.6
  Bottom Layer w15: J6.8 1295,1180 ; D10.2 1380,1095 1295,1180 ; v1(3800,935) 3745,935 3625,1055 2575,1055 2350,1280 U2.21 2170,1235 2115,1180 1295,1180
RESET: C7.1 J1.5 R4.1 SW5.2 SW5.4 U2.9 | length 2188.4
  Top Layer w15: C7.1 690,1420 690,2115 J1.5
  Bottom Layer w15: R4.1 155,1460 SW5.2 ; SW5.4 590,1430 C7.1 ; J1.5 750,2180 800,2230 800,2310 815,2325 896.51,2325 951.51,2380 U2.9
RX_RS: J2.3 U1.13 | length 1458.7
  Bottom Layer w15: U1.13 2930,2790 2995,2855 2995,3005 3070,3080 3070,3215 3135,3280 3560,3280 3750,3470 J2.3
RXD: D2.2 J6.1 U1.12 U2.14 | length 5301.6
  Bottom Layer w15: D2.2 225,695 370,840 670,840 820,990 820,1550 1150,1880 J6.1 U2.14 1625,1825 1845,1825 1905,1885 1905,3115 2110,3320 2845,3320 2895,3270 2895,2925 2860,2890 U1.12
SCK: J1.7 J4.8 R2.1 U2.8 | length 1598.1
  Top Layer w15: v1(1075,2335) 1075,2455 1100,2480 J4.8
  Bottom Layer w15: J1.7 715,2075 690,2050 690,1935 755,1870 910,1870 980,1940 980,2150 1075,2245 v1(1075,2335) ; J4.8@1165,2475 J4.8 R2.1 U2.8
TX_RS: J2.2 U1.14 | length 1590.8
  Bottom Layer w15: U1.14 2795,2690 2775,2710 2775,2800 2812.03,2837.03 2917.03,2837.03 2960,2880 2960,3030 3035,3105 3035,3230 3115,3310 3520,3310 3640.95,3430.95 J2.2
TXD: D3.2 J6.2 U1.11 U2.15 | length 4802.8
  Bottom Layer w15: D3.2 390,710 485,805 690,805 865,980 865,1505 1140,1780 J6.2 U2.15 1855,1780 1940,1865 1940,3095 2120,3275 2690,3275 2755,3210 2755,3015 2780,2990 U1.11
VCC: C1.2 C6.2 C12.1 C13.2 J1.2 J7.1 J8.1 P1.2 R1.3 R2.9 R4.2 R12.9 R14.1 R?.1 U1.16 U2.10 U2.30 U3.3 | length 14075.2
  Top Layer w25: R4.2 605,1575 635,1605 635,2395 685,2445 815,2445 850,2410 J1.2 855,2375 950,2280 U2.10 ; v1(1855,2280) v1(1990,2280) ; R14.1 2700,2530 2740,2490 U1.16
  Bottom Layer w15: U1.16 U1.16@2855,2490
  Bottom Layer w25: R4.2 395,1575 305,1485 305,991 99,785 99,361 190,270 R12.9 580,205 615,170 2310,170 R1.3 2900,290 3095,95 3254.84,95 J8.1 3264.56,65.44 3299.22,30.78 4010.78,30.78 4115,135 4115,440 4025,530 P1.2 ; R2.9 1885,3280 1955,3350 C13.2 U3.3@1955,3585 ; U2.10 v1(1855,2280) ; U3.3 U3.3@1955,3585 ; v1(1990,2280) 1990,2245 2055,2180 U2.30 2425,2180 2450,2205 C6.2 2880,2260 C1.2 ; R14.1 2490,3400 2395,3495 C12.1 U3.3@1955,3585 ; U1.16 2895,2435 C1.2 ; R?.1 3725,2665 3660,2600 J7.1 3480,2205 2925,2205 2895,2235 C1.2
pads on no net: J1.3 J2.1 J2.4 J2.6 J2.7 J2.8 J2.9 J2.10 J2.11 P1. P1.0 U1.7 U1.8 U1.9 U1.10

## Polygon pours and split planes (outlines as drawn)
GND on Bottom Layer "Top Layer-No Net" (solid, remove dead copper, pour order 0): 10,4000 5295,4000 5295,5 5300,0 5,0

## Keep-outs
Keep-Out Layer:
  lines w10: 5,0 5,3995 10,4000 5300,4000 5300,0 5,0